# EAGLE board main-board (EAGLE 9.6.2)
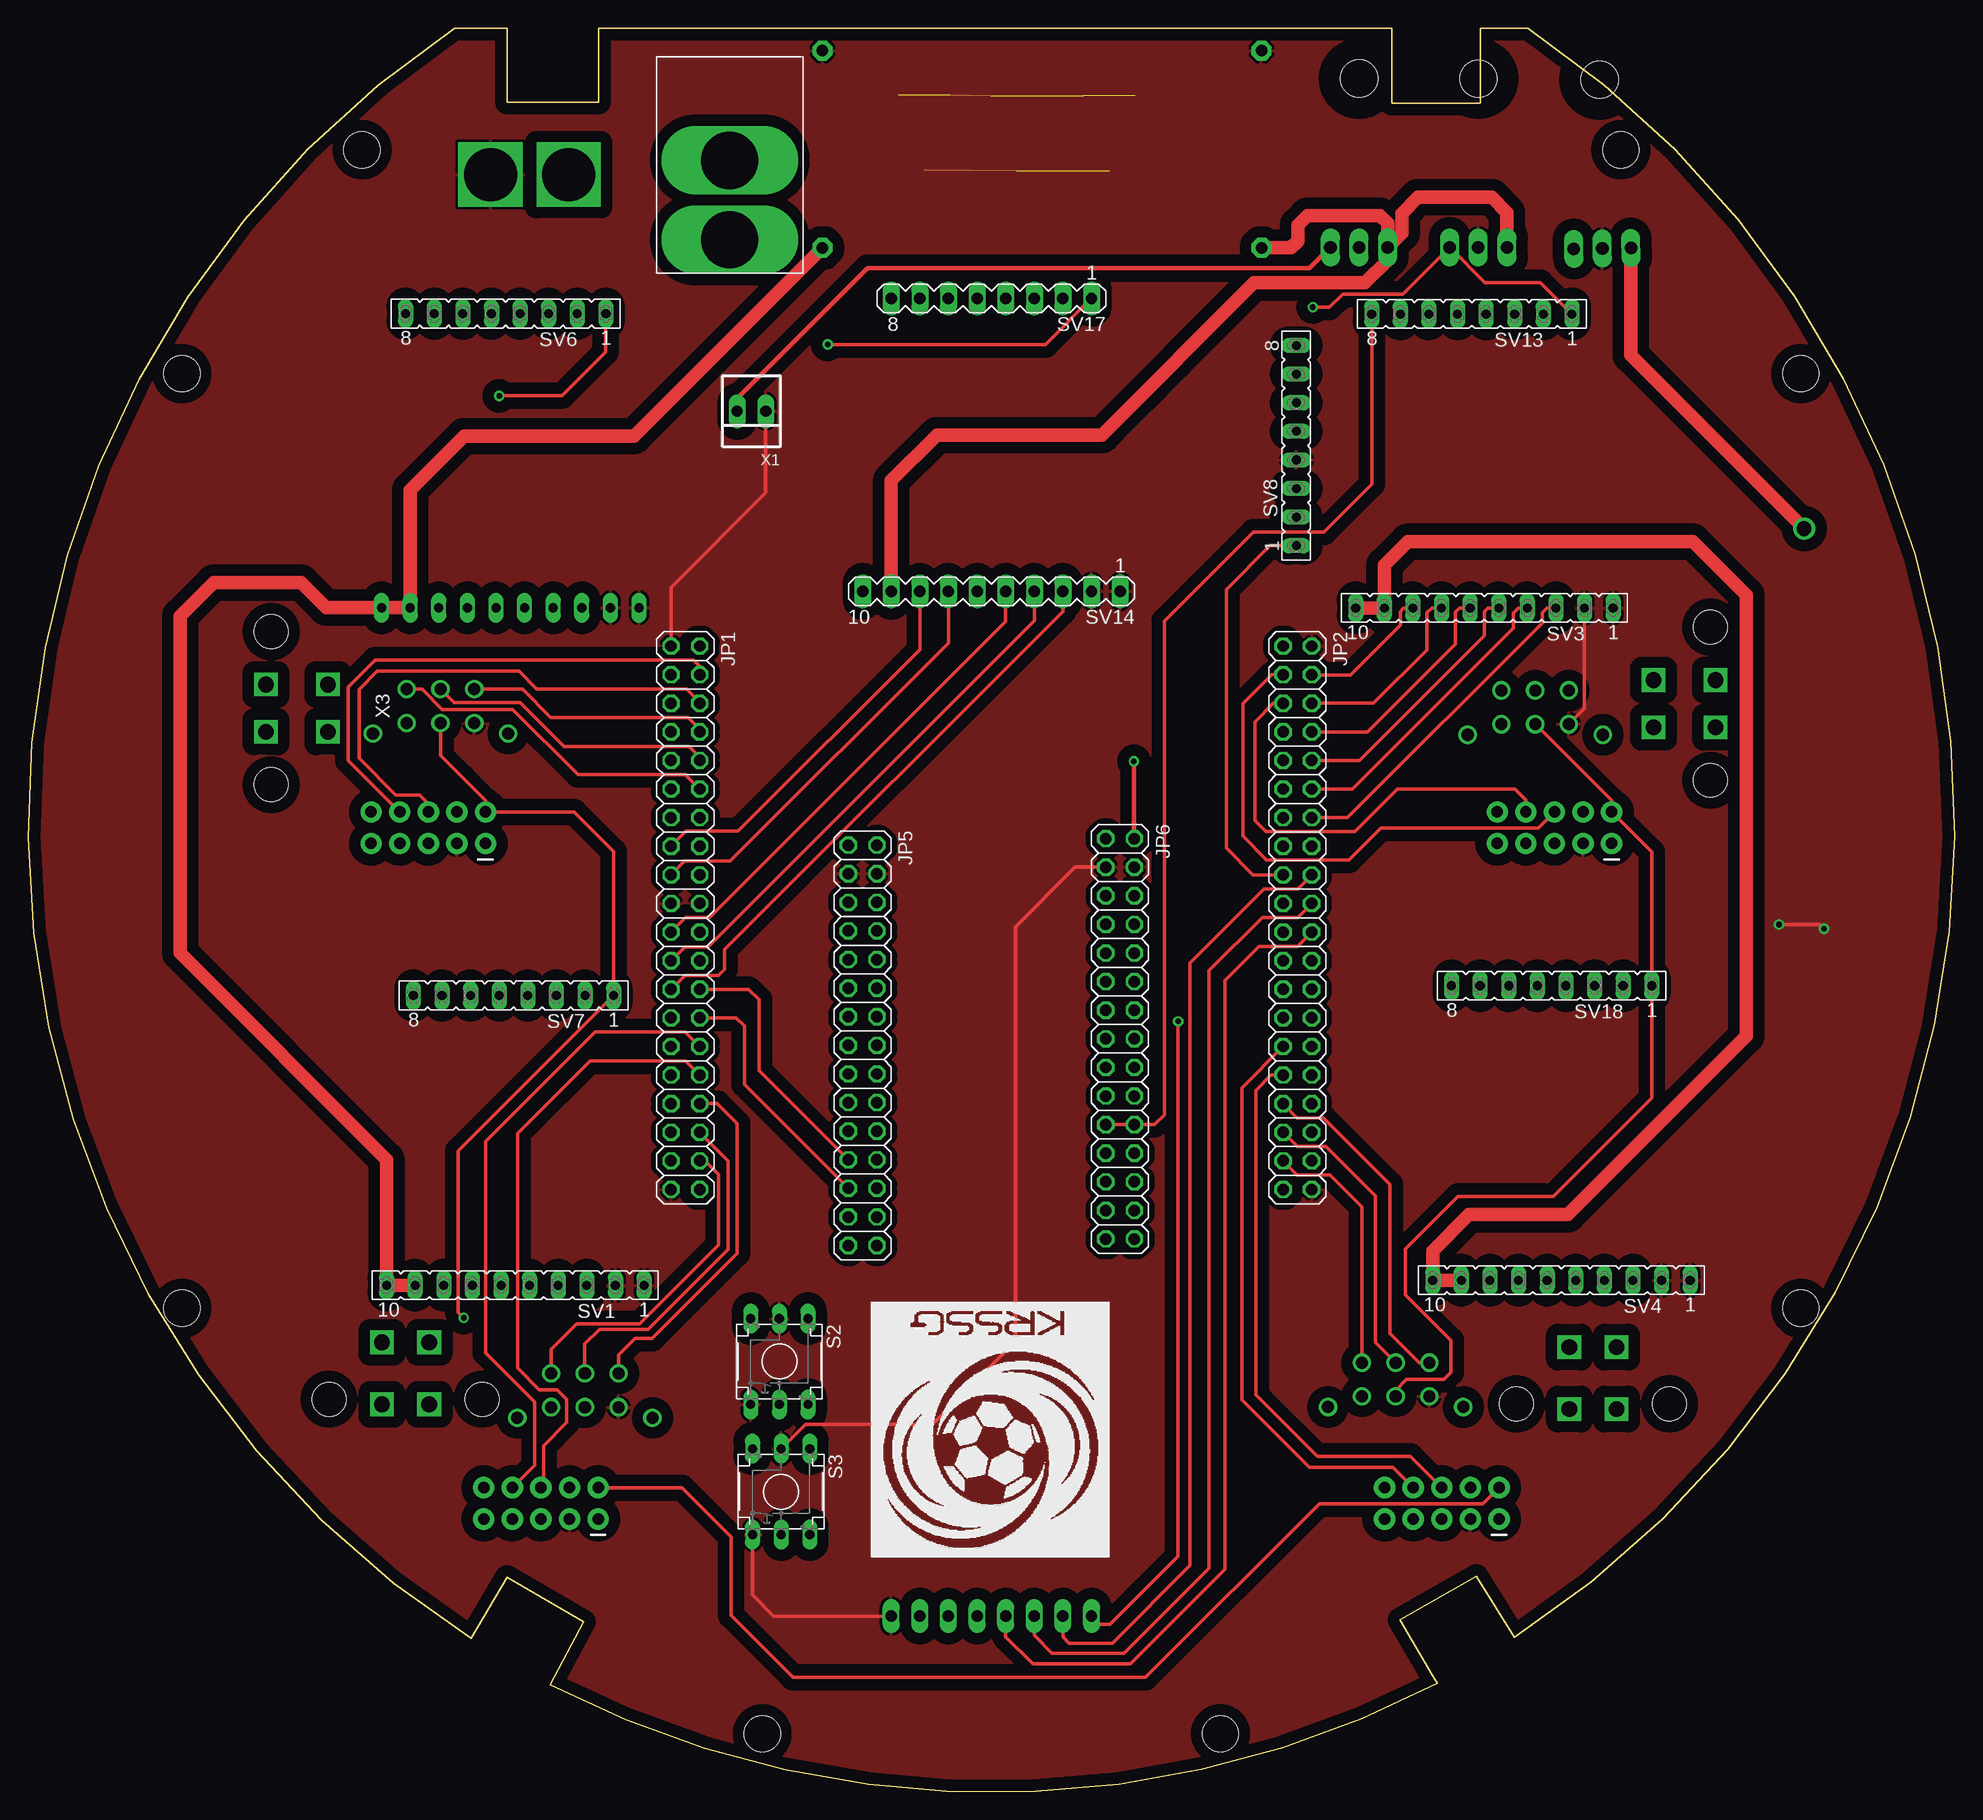
[diagram p0: board, top side]
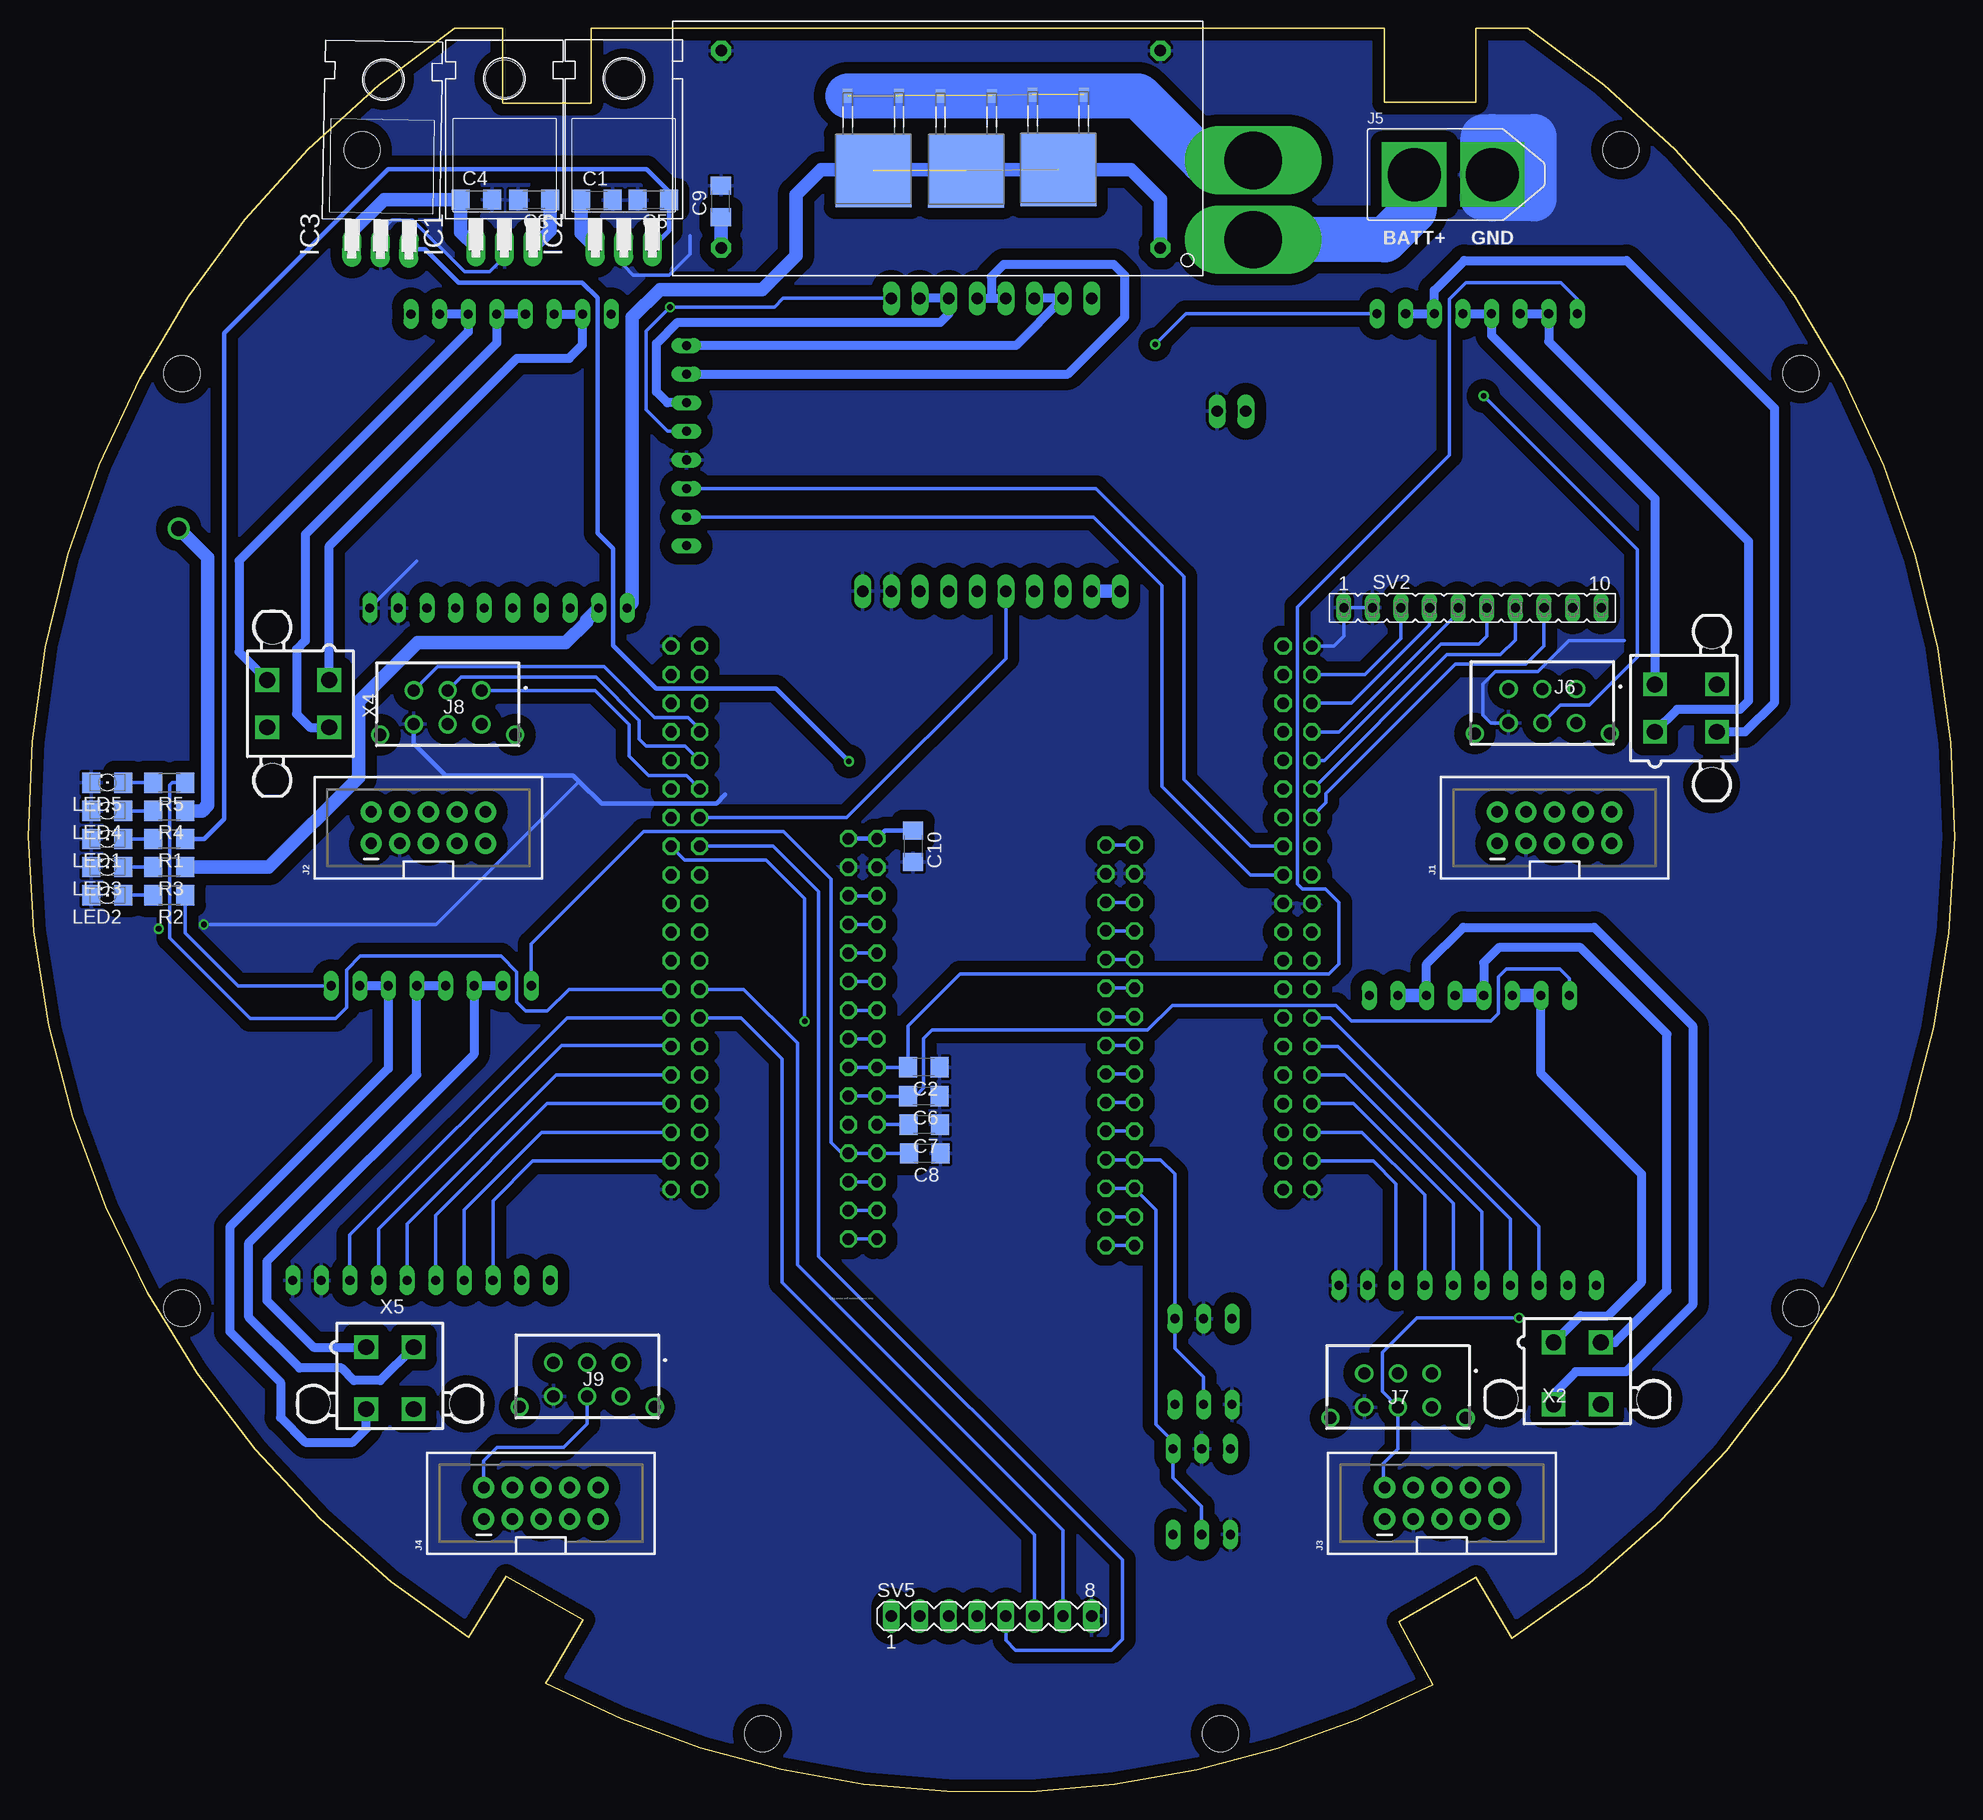
[diagram p1: board, bottom side, seen from below]

Size 171.07 x 156.59 mm. Coordinates in mm from the lower left corner, seen from the top.
Outline: 133.18,156.59 128.95,156.59 128.95,149.93 121.08,149.93 121.08,156.59 50.64,156.59 50.64,150.03 42.52,150.03 42.52,156.59 37.88,156.59 arc113 39.33,13.59 42.51,19.04 49.33,15.07 46.33,9.49 arc55 125.13,9.59 124.69,10.3 121.79,15.26 128.61,19.1 131.95,13.69 arc113 133.18,156.59
Copper layers (1*16): Top 0.035mm / dielectric 0.3mm / Bottom 0.035mm
Design rules "default *": minimum track width 6mil, minimum drill 0.35mm, track to track 6mil, track to pad 6mil, pad to pad 6mil, via to via 6mil, smd to smd 6mil, copper to edge 40mil, drill to drill 6mil, minimum pad ring 10mil, minimum via ring 8mil, stop-mask expansion 4mil, vias tented up to drill 0mil, thermal gap 10mil
Net classes: 0 signal1: width 0.3 mm, drill 0.4 mm, clearance 0.2 mm; 1 5v: width 0.4 mm, drill 0.4 mm, clearance 0.2 mm; 2 18V: width 1.2 mm, drill 1.3 mm, clearance 0.2 mm; 3 signal: width 0.3 mm, drill 0.4 mm, clearance 0.2 mm; 4 gnd: width 0.3 mm, drill 0.4 mm, clearance 0.2 mm; 5 VCKT: width 4 mm, drill 4 mm, clearance 0.2 mm; 6 motor: width 0.8 mm, drill 1 mm, clearance 0.2 mm
Holes 3.2 mm at 13.66,42.92 65.2,5.12 105.87,5.12 157.41,42.92 29.64,145.78 13.66,125.92 141.42,145.78 157.41,125.92

## Footprints (pad centres in the part's own frame; a part is rotated, then mirrored left to right if it is on the bottom)
C1206 = smd 1.6 x 1.8: 1 -1.4,0; 2 1.4,0
TO220H = drill 1.118 long: 1 -2.54,-10.16; 2 0,-10.16; 3 2.54,-10.16 | hole 3.302: 0,4.826
2X5-SHROUDED_LOCK = drill 1.016 pad 1.88: 1 -1.397,5.08; 2 1.397,5.08; 3 -1.397,2.54; 4 1.397,2.54; 5 -1.397,0; 6 1.397,0; 7 -1.397,-2.54; 8 1.397,-2.54; 9 -1.397,-5.08; 10 1.397,-5.08
XT-60 = drill 4.7 square: BATT 0,4.154; GND 0,11.092
43045-0613 = drill 1.07 pad 1.62: 1 3,0; 2 0,0; 3 -3,0; 4 3,3; 5 0,3; 6 -3,3; 7 -6,3.94; 8 6,3.94
2X20 = drill 1.016 octagon: 1 -24.13,-1.27; 2 -24.13,1.27; 3 -21.59,-1.27; 4 -21.59,1.27; 5 -19.05,-1.27; 6 -19.05,1.27; 7 -16.51,-1.27; 8 -16.51,1.27; 9 -13.97,-1.27; 10 -13.97,1.27; 11 -11.43,-1.27; 12 -11.43,1.27; 13 -8.89,-1.27; 14 -8.89,1.27; 15 -6.35,-1.27; 16 -6.35,1.27; 17 -3.81,-1.27; 18 -3.81,1.27; 19 -1.27,-1.27; 20 -1.27,1.27; 21 1.27,-1.27; 22 1.27,1.27; 23 3.81,-1.27; 24 3.81,1.27; 25 6.35,-1.27; 26 6.35,1.27; 27 8.89,-1.27; 28 8.89,1.27; 29 11.43,-1.27; 30 11.43,1.27; 31 13.97,-1.27; 32 13.97,1.27; 33 16.51,-1.27; 34 16.51,1.27; 35 19.05,-1.27; 36 19.05,1.27; 37 21.59,-1.27; 38 21.59,1.27; 39 24.13,-1.27; 40 24.13,1.27
2X15 = drill 1.016 octagon: 1 -17.78,-1.27; 2 -17.78,1.27; 3 -15.24,-1.27; 4 -15.24,1.27; 5 -12.7,-1.27; 6 -12.7,1.27; 7 -10.16,-1.27; 8 -10.16,1.27; 9 -7.62,-1.27; 10 -7.62,1.27; 11 -5.08,-1.27; 12 -5.08,1.27; 13 -2.54,-1.27; 14 -2.54,1.27; 15 0,-1.27; 16 0,1.27; 17 2.54,-1.27; 18 2.54,1.27; 19 5.08,-1.27; 20 5.08,1.27; 21 7.62,-1.27; 22 7.62,1.27; 23 10.16,-1.27; 24 10.16,1.27; 25 12.7,-1.27; 26 12.7,1.27; 27 15.24,-1.27; 28 15.24,1.27; 29 17.78,-1.27; 30 17.78,1.27
1206 = smd 1.6 x 1.803: A -1.422,0; C 1.422,0
R1206 = smd 1.6 x 1.803: 1 -1.422,0; 2 1.422,0
TME1 = drill 0.813 long: 1 -2.54,-3.81; 2 0,-3.81; 3 2.54,-3.81; 4 2.54,3.81; 5 0,3.81; 6 -2.54,3.81
FE10 = drill 0.813 long: 1 -11.43,0; 2 -8.89,0; 3 -6.35,0; 4 -3.81,0; 5 -1.27,0; 6 1.27,0; 7 3.81,0; 8 6.35,0; 9 8.89,0; 10 11.43,0
MA08-1 = drill 1.016 long: 1 -8.89,0; 2 -6.35,0; 3 -3.81,0; 4 -1.27,0; 5 1.27,0; 6 3.81,0; 7 6.35,0; 8 8.89,0
FE08 = drill 0.813 long: 1 -8.89,0; 2 -6.35,0; 3 -3.81,0; 4 -1.27,0; 5 1.27,0; 6 3.81,0; 7 6.35,0; 8 8.89,0
MA10-1 = drill 1.016 long: 1 -11.43,0; 2 -8.89,0; 3 -6.35,0; 4 -3.81,0; 5 -1.27,0; 6 1.27,0; 7 3.81,0; 8 6.35,0; 9 8.89,0; 10 11.43,0
TO228P1042X238-3N = smd 0.889 x 1.219: 1 -2.286,-6.502; 3 2.286,-6.502 | smd 6.731 x 6.502: 2 0,0.152
BUCK = drill 1.016 pad 1.778 octagon: GND 0,0; GNDO 39,0; VIN 0,17.5; VOUT 39,17.5
DA10 = drill 5.08 pad 5.334 long: P$1 0,0; P$2 -7.048,0
22-23-2021 = drill 1 long: 1 -1.27,0; 2 1.27,0
5566-4 = drill 1.4 square: 1 2.1,-2.75; 2 -2.1,-2.75; 3 2.1,2.75; 4 -2.1,2.75 | hole 3: 6.8,2.29; -6.8,2.29

## Placement (x,y rotation side)
C1  47uF  [C1206]  120.58,141.33 0 bottom
C2  47uF  [C1206]  91.53,64.31 180 bottom
C3  47uF  [C1206]  126.14,141.33 180 bottom
C4  47uF  [C1206]  131.26,141.36 0 bottom
C5  47uF  [C1206]  115.56,141.33 180 bottom
C6  47uF  [C1206]  91.53,61.74 180 bottom
C7  47uF  [C1206]  91.51,59.22 180 bottom
C8  47uF  [C1206]  91.45,56.66 180 bottom
C9  47uF  [C1206]  109.55,141.19 90 bottom
C10  47uF  [C1206]  92.49,83.95 270 bottom
IC1  7805T  [TO220H]  128.77,147.28 0 bottom
IC2  7805T  [TO220H]  118.18,147.29 0 bottom
IC3  7805T  [TO220H]  139.61,147.18 359 bottom
J1  [2X5-SHROUDED_LOCK]  35.53,85.59 90 bottom
J2  [2X5-SHROUDED_LOCK]  135.53,85.59 90 bottom
J3  [2X5-SHROUDED_LOCK]  45.53,25.59 90 bottom
J4  [2X5-SHROUDED_LOCK]  125.53,25.59 90 bottom
J5  XT-60BATT_LABEL  [XT-60]  52.14,143.59 270 bottom
J6  43045-0613  [43045-0613]  36.61,97.89 180 bottom
J7  43045-0613  [43045-0613]  49.43,37.13 180 bottom
J8  43045-0613  [43045-0613]  133.82,97.78 180 bottom
J9  43045-0613  [43045-0613]  121.43,38.08 180 bottom
JP1  [2X20]  58.36,77.59 270 top
JP2  [2X20]  112.71,77.59 270 top
JP5  [2X15]  74.1,66.26 270 top
JP6  [2X15]  96.96,66.84 270 top
LED1  [1206]  164.03,84.59 180 bottom
LED2  [1206]  164.03,79.59 180 bottom
LED3  [1206]  164.03,82.09 180 bottom
LED4  [1206]  164.03,87.09 180 bottom
LED5  [1206]  164.03,89.59 180 bottom
R1  [R1206]  158.53,84.59 180 bottom
R2  [R1206]  158.53,79.59 180 bottom
R3  [R1206]  158.53,82.09 180 bottom
R4  [R1206]  158.53,87.09 180 bottom
R5  [R1206]  158.53,89.59 180 bottom
S2  TME1  [TME1]  66.7,38.18 180 top
S3  TME1  [TME1]  66.86,26.63 180 top
SV1  [FE10]  43.25,44.95 180 top
SV2  [FE10]  42.81,105.12 0 bottom
SV3  [FE10]  129.31,105.1 180 top
SV4  [FE10]  136.15,45.4 180 top
SV5  [MA08-1]  85.53,15.59 0 bottom
SV6  [FE08]  42.4,131.24 180 top
SV7  [FE08]  43.09,70.69 180 top
SV8  [FE08]  112.61,119.52 90 top
SV13  [FE08]  128.19,131.2 180 top
SV14  [MA10-1]  85.53,106.59 180 top
SV17  [MA08-1]  85.53,132.59 180 top
SV18  [FE08]  135.28,71.55 180 top
U1  [TO228P1042X238-3N]  96.01,144.08 180 bottom
U2  [TO228P1042X238-3N]  87.78,144.07 180 bottom
U3  [TO228P1042X238-3N]  79.59,144.18 180 bottom
U$1  [LOGO3]  96,43.46 180 top
U$4  BUCK  [BUCK]  70.53,154.59 180 bottom
U$5  [DA10]  62.29,144.85 90 top
X1  22-23-2021  [22-23-2021]  64.22,122.57 180 top
X2  5566-4  [5566-4]  33.51,37.13 180 bottom
X3  5566-4  [5566-4]  23.86,96.21 270 bottom
X4  5566-4  [5566-4]  147.09,96.6 90 bottom
X5  5566-4  [5566-4]  138.95,36.71 180 bottom

## Library data of the parts
C1-C10 = rcl
IC1-IC3 = linear
J1-J4 = SparkFun-Connectors; PROD_ID: CONN-08671; SF_ID: PRT-08506
J5 = RoboJackets-Connectors
J6-J9 = 43045-0613; ALLIED_NUMBER: 70090681; ALLIED_PRICE-STOCK: http://www.alliedelec.com/molex-incorporated-43045-0613/70090681/; DESCRIPTION: Header 3.00mm, WTB, dual row, vert,6w Molex MICRO-FIT 3.0 Series, Series Number 43045, 3mm Pitch 6 Way 2 Row Straight PCB Header, Solder Termination, 5A; HEIGHT: mm; MANUFACTURER_NAME: Molex; MANUFACTURER_PART_NUMBER: 43045-0613; MOUSER_PART_NUMBER: 538-43045-0613; MOUSER_PRICE-STOCK: https://www.mouser.com/Search/Refine.aspx?Keyword=538-43045-0613; RS_PART_NUMBER: 6700377P; RS_PRICE-STOCK: http://uk.rs-online.com/web/p/products/6700377P
JP1 JP2 JP5 JP6 = pinhead
LED1-LED5 = led
R1-R5 = resistor
S2 S3 = switch-misc
SV1-SV4 SV6-SV8 SV13 SV18 = con-lsta; OC_FARNELL: unknown; OC_NEWARK: unknown
SV5 SV14 SV17 = con-lstb; OC_FARNELL: unknown; OC_NEWARK: unknown
U1-U3 = LP38690DT-3.3; MPN: LP38690DT-3.3; OC_FARNELL: 1008048; OC_NEWARK: 41K7439; PACKAGE: TO-252; SUPPLIER: National Semiconductor
U$1 = krssg_logo
U$4 = BUCK
U$5 = switch_DA10
X1 = con-molex; MF: MOLEX; MPN: 22-23-2021; OC_FARNELL: 1462926; OC_NEWARK: 25C3832
X2-X5 = con-molex; MF: MOLEX; OC_FARNELL: unknown; OC_NEWARK: unknown

## Nets
5V1 [5v]: C5.1 IC2.3 R1.1 X1.2
5V_ESP [5v]: C10.1 IC3.3 JP6.1 JP6.2
12V [18V]: C1.1 C4.1 C9.1 IC1.1 IC2.1 IC3.1 R4.1 SV14.9 SV14.10 U$4.VOUT
18V [18V]: R3.1 SV1.9 SV1.10 SV2.9 SV2.10 SV3.9 SV3.10 SV4.9 SV4.10 U1.2 U2.2 U3.2 U$4.VIN
CHARGE [signal]: JP2.16 SV5.1
DONE [signal]: JP2.18 SV5.2
ESP_EN [signal]: JP2.24
ESP_REC [signal]: JP6.15 JP6.16
ESP_RX [signal]: JP1.26 JP5.23 JP5.24 S2.1 S2.5
ESP_TRANS [signal]: JP6.13 JP6.14
ESP_TX [signal]: JP1.28 JP5.25 JP5.26 S3.1 S3.5
FPGA_REC [signal]: JP2.26 R5.1
GND [gnd]: C1.2 C2.1 C3.2 C4.2 C5.2 C6.1 C7.1 C8.1 C9.2 C10.2 IC1.2 IC2.2 IC3.2 J1.3 J2.3 J3.3 J4.3 J5.GND J6.4 J7.4 J8.4 J9.4 JP1.1 JP1.19 JP1.20 JP1.39 JP2.2 JP2.40 JP5.3 JP5.4 JP6.3 JP6.4 LED1.C LED2.C LED3.C LED4.C LED5.C S2.2 S2.4 S3.2 S3.4 SV1.1 SV1.2 SV2.1 SV2.2 SV3.1 SV3.2 SV4.1 SV4.2 SV5.8 SV8.4 SV14.1 SV14.2 U$4.GND U$4.GNDO X1.1
INPUT [VCKT]: U1.1 U1.3 U2.1 U2.3 U3.1 U3.3 U$5.P$1
IR1 [signal]: JP2.25 SV5.7
IR2 [signal]: JP2.27 SV5.6
IR3 [signal]: JP2.15 SV5.5
KICK [signal]: JP2.22 SV5.4
KICK_CHIP [signal]: JP2.20 SV5.3
M1ACS_OUT [signal]: C2.2 JP6.17 JP6.18 SV6.8
M1EA [signal]: J1.6 JP1.6
M1EB [signal]: J1.8 JP1.4
M1H1 [signal]: J6.1 JP1.8
M1H2 [signal]: J6.2 JP1.10
M1H3 [signal]: J6.3 JP1.12
M2ACS_OUT [signal]: C6.2 JP6.19 JP6.20 SV7.8
M2EA [signal]: J3.6 JP1.32
M2EB [signal]: J3.8 JP1.30
M2H1 [signal]: J7.1 JP1.34
M2H2 [signal]: J7.2 JP1.36
M2H3 [signal]: J7.3 JP1.38
M3ACS_OUT [signal]: C7.2 JP6.21 JP6.22 SV13.8
M3EA [signal]: J2.6 JP2.3
M3EB [signal]: J2.8 JP2.5
M3H1 [signal]: J8.1 JP2.7
M3H2 [signal]: J8.2 JP2.9
M3H3 [signal]: J8.3 JP2.11
M4ACS_OUT [signal]: C8.2 JP6.23 JP6.24 SV18.8
M4EA [signal]: J4.6 JP2.31
M4EB [signal]: J4.8 JP2.29
M4H1 [signal]: J9.1 JP2.33
M4H2 [signal]: J9.2 JP2.35
M4H3 [signal]: J9.3 JP2.37
M11 [motor]: SV6.6 SV6.7 X3.1
M11A [signal]: JP1.13 SV2.8
M11B [signal]: JP1.11 SV2.7
M12 [motor]: SV6.4 SV6.5 X3.2
M12A [signal]: JP1.9 SV2.6
M12B [signal]: JP1.7 SV2.5
M13 [motor]: SV6.2 SV6.3 X3.3
M13A [signal]: JP1.5 SV2.4
M13B [signal]: JP1.3 SV2.3
M21 [motor]: SV7.6 SV7.7 X2.1
M21A [signal]: JP1.27 SV1.8
M21B [signal]: JP1.29 SV1.7
M22 [motor]: SV7.4 SV7.5 X2.2
M22A [signal]: JP1.31 SV1.6
M22B [signal]: JP1.33 SV1.5
M23 [motor]: SV7.2 SV7.3 X2.3
M23A [signal]: JP1.35 SV1.4
M23B [signal]: JP1.37 SV1.3
M31 [motor]: SV13.6 SV13.7 X4.1
M31A [signal]: JP2.4 SV3.8
M31B [signal]: JP2.6 SV3.7
M32 [motor]: SV13.4 SV13.5 X4.2
M32A [signal]: JP2.8 SV3.6
M32B [signal]: JP2.10 SV3.5
M33 [motor]: SV13.2 SV13.3 X4.3
M33A [signal]: JP2.12 SV3.4
M33B [signal]: JP2.14 SV3.3
M41 [motor]: SV18.6 SV18.7 X5.1
M41A [signal]: JP2.38 SV4.8
M41B [signal]: JP2.36 SV4.7
M42 [motor]: SV18.4 SV18.5 X5.2
M42A [signal]: JP2.34 SV4.6
M42B [signal]: JP2.32 SV4.5
M43 [motor]: SV18.2 SV18.3 X5.3
M43A [signal]: JP2.30 SV4.4
M43B [signal]: JP2.28 SV4.3
MD1 [motor]: SV8.8 SV17.6 SV17.7
MD1A [signal]: JP1.15 SV14.8
MD1B [signal]: JP1.17 SV14.7
MD2 [motor]: SV8.7 SV17.4 SV17.5
MD2A [signal]: JP2.13 SV14.6
MD2B [signal]: JP1.21 SV14.5
MD3 [motor]: SV8.6 SV17.2 SV17.3
MD3A [signal]: JP1.23 SV14.4
MD3B [signal]: JP1.25 SV14.3
MDACS_OUT: SV17.8
MDH1 [signal]: JP1.16 SV8.3
MDH2 [signal]: JP1.18 SV8.2
MDH3 [signal]: JP2.17 SV8.1
N$1: JP5.1 JP5.2
N$4: LED1.A R1.2
N$6: JP5.5 JP5.6
N$7: LED2.A R2.2
N$8: JP5.7 JP5.8
N$9: JP5.9 JP5.10
N$10: LED3.A R3.2
N$11: JP5.11 JP5.12
N$12: JP5.13 JP5.14
N$13: LED4.A R4.2
N$14: JP5.15 JP5.16
N$15: JP5.17 JP5.18
N$16: LED5.A R5.2
N$17: JP5.19 JP5.20
N$18: JP5.21 JP5.22
N$23: JP5.27 JP5.28
N$24: JP5.29 JP5.30
N$27: JP6.5 JP6.6
N$28: JP6.7 JP6.8
N$29: JP6.9 JP6.10
N$30: JP6.11 JP6.12
N$38: JP6.27 JP6.28
N$39: JP6.29 JP6.30
N$41: JP6.25 JP6.26
SUPP [VCKT]: J5.BATT U$5.P$2
VCC: C3.1 IC1.3 J1.2 J2.2 J3.2 J4.2 J6.5 J7.5 J8.5 J9.5 R2.1 SV6.1 SV7.1 SV8.5 SV13.1 SV17.1 SV18.1

## Tracks (layer width: path | path; a pad name or v marks a point on that pad's centre or on a via)
5V1
  Top 0.4: IC2.3 113.77,135.26 74.53,135.26 62.95,123.68 X1.2
  Bottom 0.4: IC2.3 114.16,138.61 C5.1 114.16,142.06 116.16,144.05 139.12,144.05 153.66,129.52 153.66,86.38 155.45,84.59 R1.1
5V_ESP  (via drill 0.5)
  Top 0.4: v98.19,91.48 98.19,84.67 JP6.2
  Bottom 0.4: C10.1 94.97,85.35 JP6.1 JP6.2 | IC3.3 135.83,136.98 132.86,134.01 121.86,134.01 120.49,132.64 120.49,111.74 119.15,110.39 119.15,101.76 115.33,97.94 110.09,97.94 109.36,97.94 104.65,97.94 v98.19,91.48
12V  (via drill 1.3)
  Top 1.2: v157.71,112.15 142.33,127.53 IC3.1 | IC1.1 131.31,140.22 129.98,141.56 123.42,141.56 121.99,140.13 121.99,138.39 IC2.1 | IC2.1 120.72,139.28 120.05,139.95 113.61,139.95 112.75,139.08 112.75,137.69 112.14,137.09 U$4.VOUT | IC2.1 120.72,135.99 118.71,133.98 108.86,133.98 95.34,120.46 80.7,120.46 76.64,116.41 SV14.9
  Bottom 1.2: R4.1 155.63,87.09 155.13,87.59 155.13,94.05 155.13,109.58 v157.71,112.15 | IC1.1 132.66,138.47 C4.1 139.48,141.36 142.33,138.51 IC3.1 | C1.1 121.98,138.39 IC2.1 | C9.1 109.53,139.77 U$4.VOUT | SV14.10 SV14.9
18V  (2 unrouted)
  Top 1.2: SV4.9 SV4.10 124.72,48.03 127.95,51.26 136.74,51.26 152.58,67.1 152.58,106.24 147.82,111.01 122.54,111.01 120.42,108.89 SV3.9 SV3.10 | SV1.9 SV1.10 31.82,56.11 13.49,74.44 13.49,104.36 16.46,107.33 24.23,107.33 26.45,105.12 SV2.10 SV2.9 33.92,115.57 38.71,120.36 53.81,120.36 U$4.VIN
  Bottom 1.2: U$4.VIN 70.53,141.42 73.15,144.03 U3.2 100.68,144.03 102.89,141.82 102.89,136.39 105.9,133.38 114.96,133.38 117.42,130.91 117.42,105.56 SV3.10 | SV3.9 121.5,104.02 121.5,103.84 123.33,102.01 136.49,102.01 141.73,96.77 141.73,90.06 149.7,82.09 R3.1
CHARGE  (via drill 0.5)
  Top 0.3: v102.12,68.39 102.11,68.39 102.11,20.89 96.06,14.84 95.17,14.84 SV5.1
  Bottom 0.3: JP2.16 112.78,82.74 105.55,82.74 102.12,79.32 v102.12,68.39
DONE
  Top 0.3: JP2.18 112.75,80.16 109.75,80.16 103.18,73.59 103.18,20.07 96.28,13.17 92.45,13.17 91.88,13.74 SV5.2
ESP_REC
  Bottom 0.3: JP6.16 JP6.15
ESP_RX
  Top 0.3: JP5.23 64.9,64.03 64.9,70.33 63.99,71.24 JP1.26
  Bottom 0.3: S2.5 66.7,36.82 69.24,39.36 S2.1 69.24,54.83 70.52,56.1 JP5.23 JP5.24
ESP_TRANS
  Bottom 0.3: JP6.13 JP6.14
ESP_TX
  Top 0.3: JP1.28 62.88,68.7 63.61,67.97 63.61,62.78 JP5.25
  Bottom 0.3: JP5.26 JP5.25 70.91,51.63 70.91,32.59 69.4,31.09 S3.1 69.4,27.87 66.86,25.33 S3.5
FPGA_REC
  Bottom 0.3: JP2.26 123.04,71.24 124.99,69.29 126.9,69.29 127.7,70.1 127.7,72.79 129.09,74.18 141.59,74.18 142.81,72.97 142.81,69.63 143.78,68.65 151.36,68.65 158.5,75.8 158.5,89.37 158.29,89.59 R5.1
GND  (via drill 0.5)
  Top 0.3: X1.1 65.49,115.32 57.09,106.92 JP1.1 | S3.2 69.03,32.61 80.32,32.61 87.67,39.96 87.67,76.79 92.96,82.08 JP6.3 | S3.4 64.32,17.47 66.21,15.58 SV5.8 | SV3.2 138.2,96.16 J8.4 | v155.48,76.99 159.11,76.99 v159.48,76.62
  Bottom 0.3: SV2.2 SV2.1 54.24,102.6 55.13,101.72 JP1.1 | J6.4 41.18,94.89 41.9,95.61 41.9,98.35 40.78,99.47 36.99,99.47 34.24,102.22 29.35,102.22 | 112.29,138.16 112.29,136.53 114.16,134.66 117.34,134.66 118.2,135.52 118.2,137.11 IC2.2 | SV3.1 136.6,109.25 | 122.15,89.7 134.86,76.99 v155.48,76.99 | IC3.2 139.79,138.54 138.78,139.55 136.93,139.55 132.34,134.95 130.11,134.95 128.77,136.28 IC1.2
  Bottom 0.4: J8.4 136.82,93.06 134.01,90.24 122.69,90.24 122.15,89.7 120.17,87.72 109.97,87.72 109.17,88.52
  Bottom 4: J5.GND 41.05,146.96 37.35,146.96 37.35,141.44 41.05,141.44 J5.GND | J5.GND 41.92,143.59 | J5.GND 41.94,143.59 41.94,141.56 | J5.GND 41.89,143.59 41.89,146.92
  pour Bottom (isolate 1.016): 22.03,166.87 141.41,166.87 180.78,127.5 180.78,43.68 128.71,-8.39 37.27,-8.39 -11.33,40.21 -11.33,133.51
  pour Top (isolate 1.016): 22.03,166.87 141.41,166.87 180.78,127.5 180.78,43.68 128.71,-8.39 37.27,-8.39 -10.99,39.87 -10.99,133.85
INPUT  (5 unrouted)
  Bottom 4: U$5.P$1 66.76,144.85 72.49,150.58 U1.3
IR1
  Bottom 0.3: SV5.7 79.18,23.19 102.77,46.77 102.77,66.48 107.53,71.24 JP2.25
IR2
  Bottom 0.3: JP2.27 107.75,68.7 104.11,65.06 104.11,45.2 81.72,22.81 SV5.6
IR3
  Bottom 0.3: JP2.15 104.91,83.94 100.88,79.9 100.88,47.54 73.89,20.55 73.89,13.54 74.87,12.56 83.38,12.56 84.26,13.45 SV5.5
KICK
  Top 0.3: SV5.4 86.8,13.75 89.22,11.33 97.88,11.33 106.27,19.72 106.27,72 109.31,75.04 112.7,75.04 JP2.22
KICK_CHIP
  Top 0.3: JP2.20 112.74,77.62 109.59,77.62 104.86,72.89 104.86,19.81 97.31,12.27 90.94,12.27 89.34,13.86 SV5.3
M1ACS_OUT
  Bottom 0.3: SV6.8 33.51,132.53 34.97,133.99 43.41,133.99 44.88,132.51 44.88,118.66 58.36,105.19 58.36,101.94 58.36,80.6 57.91,80.14 55.89,80.14 54.67,78.93 54.67,73.49 55.57,72.6 88.31,72.6 92.93,67.98 C2.2 JP6.17 JP6.18
M1EA
  Top 0.3: JP1.6 59.63,96.74 58.45,97.91 45.15,97.91 43.58,99.48 30.98,99.48 29.37,97.87 29.37,91.77 32.64,88.5 34.76,88.5 35.53,87.72 J1.6
M1EB
  Top 0.3: J1.8 28.43,91.55 28.43,98.08 30.81,100.47 59.11,100.47 59.63,99.95 JP1.4
M1H1
  Top 0.3: J6.1 43.9,97.89 46.41,95.37 58.62,95.37 59.63,94.36 JP1.8
M1H2
  Top 0.3: JP1.10 59.63,91.86 58.7,92.79 47.57,92.79 43.67,96.7 37.81,96.7 J6.2
M1H3
  Top 0.3: JP1.12 58.35,90.3 48.82,90.3 43.02,96.09 36.77,96.09 34.97,97.89 J6.3
M2ACS_OUT
  Bottom 0.3: JP6.20 JP6.19 95.67,61.74 C6.2 92.27,61.74 91.55,62.46 91.55,66.88 90.82,67.61 71.66,67.61 69.46,69.81 54.96,69.81 53.56,68.41 41.18,68.41 40.51,69.09 40.51,72.35 39.81,73.05 35.06,73.05 34.2,72.19 SV7.8
M2EA
  Top 0.3: JP1.32 58.37,64.88 49.91,64.88 43.45,58.42 43.45,37.6 45.38,35.67 46.99,35.67 47.83,34.83 47.83,32.79 45.76,30.72 45.76,27.21 J3.6
M2EB
  Top 0.3: JP1.30 58.33,67.46 50.36,67.46 40.64,57.74 40.64,38.94 44.98,34.61 44.98,28.97 J3.8
M2H1
  Top 0.3: J7.1 52.43,38.77 53.91,40.25 55.41,40.25 62.95,47.79 62.95,59.32 61.17,61.1 59.65,61.1 JP1.34
M2H2
  Top 0.3: J7.2 49.43,39.74 50.73,41.04 55.03,41.04 62.16,48.16 62.16,56.01 JP1.36
M2H3
  Top 0.3: J7.3 46.43,39.27 48.71,41.55 54.3,41.55 61.31,48.56 61.31,54.82 60.13,56 JP1.38
M3ACS_OUT
  Top 0.3: SV13.8 119.3,116.08 115.05,111.83 108.79,111.83 100.89,103.92 100.89,60.09 100.01,59.22 JP6.22 JP6.21
  Bottom 0.3: C7.2 JP6.21
M3EA
  Top 0.3: J2.6 134.1,85.56 120.12,85.56 117.3,82.74 109.97,82.74 107.87,84.84 107.87,96.62 110.43,99.18 JP2.3
M3EB
  Top 0.3: JP2.5 110.6,96.64 108.94,94.99 108.94,86.22 109.92,85.24 117.81,85.24 121.58,89.01 132.04,89.01 132.99,88.05 J2.8
M3H1
  Bottom 0.3: J8.1 134.72,99.89 119.94,99.89 115.44,95.38 112.47,95.38 111.44,94.35 JP2.7
M3H2
  Bottom 0.3: J8.2 132.64,98.97 120.65,98.97 116.81,95.12 116.81,93.45 116.21,92.84 112.73,92.84 JP2.9
M3H3
  Bottom 0.3: J8.3 120.73,97.78 117.71,94.76 117.71,91.93 115.98,90.21 112.63,90.21 JP2.11
M4ACS_OUT
  Bottom 0.3: C8.2 95.67,56.66 | 95.67,56.66 JP6.23 | JP6.24 98.21,56.66 | 98.21,56.66 95.67,56.66 | SV18.8 126.39,75.27 116.41,85.26 103.99,85.26 99.79,81.05 99.79,57.64 98.8,56.66 98.21,56.66
M4EA
  Top 0.3: JP2.31 110.37,63.62 109.02,62.27 109.02,35.23 114.49,29.76 122.76,29.76 J4.6
M4EB
  Top 0.3: JP2.29 107.77,62.49 107.77,34.78 113.76,28.78 121.2,28.78 J4.8
M4H1
  Top 0.3: JP2.33 112.69,59.83 115.02,59.83 120.93,53.92 120.93,40.7 123.55,38.08 J9.1
M4H2
  Top 0.3: J9.2 119.64,39.88 119.64,52.89 115.25,57.28 112.7,57.28 JP2.35
M4H3
  Top 0.3: J9.3 118.43,51.91 115.58,54.77 112.68,54.77 JP2.37
M11
  Bottom 0.8: SV6.6 SV6.7 36.05,128.77 18.32,111.04 18.32,96.84 19.07,96.09 24.63,96.09 X3.1
M11A
  Bottom 0.3: SV2.8 36.46,101.72 38.08,100.1 44.33,100.1 55.82,88.62 55.82,87.81 57.09,86.54 JP1.13
M11B
  Bottom 0.3: SV2.7 39.01,102.27 40.33,100.95 45.07,100.95 57,89.02 JP1.11
M12
  Bottom 0.8: SV6.4 SV6.5 41.13,129.33 26.61,114.81 X3.2
M12A
  Bottom 0.3: JP1.9 55.97,91.56 45.65,101.88 42.25,101.88 41.54,102.59 SV2.6
M12B
  Bottom 0.3: SV2.5 44.08,104.71 54.69,94.1 JP1.7
M13
  Bottom 0.8: X3.3 18.6,94.11 15.99,96.72 15.99,122.81 29.13,135.95 43.55,135.95 46.21,133.29 SV6.3 SV6.2
M13A
  Bottom 0.3: JP1.5 53.56,96.64 46.62,103.58 SV2.4
M13B
  Bottom 0.3: SV2.3 49.16,102.37 52.35,99.18 JP1.3
M21
  Bottom 0.8: X2.1 33.24,42.26 30.8,42.26 27.8,45.26 27.8,54.81 36.74,63.75 SV7.7
  Bottom 1.2: SV7.7 SV7.6
M21A
  Bottom 0.3: SV1.8 36.9,50.16 55.44,68.7 JP1.27
M21B
  Bottom 0.3: SV1.7 39.44,50.85 54.75,66.16 JP1.29
M22
  Bottom 0.8: X2.2 30.16,39.88 25.54,44.49 25.54,67.26 33.22,74.94 40.48,74.94 41.82,73.6 SV7.5
  Bottom 1.2: SV7.5 SV7.4
M22A
  Bottom 0.3: SV1.6 41.98,51.46 54.15,63.62 JP1.31
M22B
  Bottom 0.3: SV1.5 44.52,52.21 53.39,61.08 JP1.33
M23
  Bottom 0.8: SV7.3 46.9,73.47 43.64,76.74 32.01,76.74 23.27,68 23.27,43.2 29.2,37.27 33.65,37.27 35.61,35.31 X2.3
  Bottom 1.2: SV7.3 SV7.2
M23A
  Bottom 0.3: SV1.4 47.06,52.99 52.62,58.54 JP1.35
M23B
  Bottom 0.3: SV1.3 49.6,53.97 51.64,56 JP1.37
M31
  Bottom 0.8: X4.1 144.34,110.61 127.67,127.28 123.04,127.28 121.84,128.48 SV13.7 SV13.6
M31A
  Top 0.3: SV3.8 122.14,105.1 121.84,104.8 121.84,103.58 117.42,99.16 114.01,99.16 JP2.4
M31B
  Top 0.3: SV3.7 124.63,105.1 124.22,104.69 124.22,101.38 119.48,96.64 JP2.6
M32
  Bottom 0.8: SV13.5 SV13.4 129.46,128.63 146.47,111.62 146.47,102.19 147.24,101.42 147.24,95.69 146.05,94.5 X4.2
M32A
  Top 0.3: SV3.6 127.09,105.1 126.73,104.74 126.73,101.9 118.92,94.1 JP2.8
M32B
  Top 0.3: SV3.5 129.64,105.1 129.3,104.76 129.3,102.66 118.2,91.56 JP2.10
M33
  Bottom 0.8: X4.3 152.34,101.19 152.34,109.29 132,129.62 SV13.3 SV13.2
M33A
  Top 0.3: SV3.4 132.34,105.1 131.88,104.64 131.88,103.3 117.61,89.02 JP2.12
M33B
  Top 0.3: JP2.14 117.15,86.48 134.45,103.77 134.45,104.69 134.85,105.1 SV3.3
M41
  Bottom 0.8: SV18.7 SV18.6 131.47,65.46 149.88,47.05 149.88,43.6 145.74,39.46 X5.1
M41A
  Bottom 0.3: JP2.38 126.26,56 129.8,52.46 SV4.8
M41B
  Top 0.3: 132.43,45.49 SV4.7
  Bottom 0.3: SV4.7 132.34,51.66 125.46,58.54 JP2.36
M42
  Bottom 0.8: SV18.5 SV18.4 136.55,63.64 151.47,48.72 151.47,42.1 146.98,37.61 143.25,37.61 142.15,36.51 139.81,36.51 X5.2
M42A
  Bottom 0.3: JP2.34 124.97,61.08 134.88,51.17 SV4.6
M42B
  Bottom 0.3: JP2.32 124.2,63.62 137.42,50.39 SV4.5
M43
  Bottom 0.8: SV18.2 SV18.3 139.09,64.2 153.16,50.13 153.16,40.84 148.67,36.35 148.67,33.21 146.47,31.02 142.25,31.02 141.05,32.21 X5.3
M43A
  Bottom 0.3: SV4.4 139.96,49.96 123.68,66.24 114.06,66.24 JP2.30
M43B
  Bottom 0.3: JP2.28 123.23,68.7 142.5,49.43 SV4.3
MD1
  Bottom 0.8: SV17.6 SV17.7 83.36,128.41 SV8.8
MD1A
  Top 0.3: JP1.15 58.43,85.28 63.04,85.28 79.18,101.42 SV14.8
MD1B
  Top 0.3: JP1.17 58.3,82.61 62.35,82.61 81.72,101.99 SV14.7
MD2
  Bottom 0.8: SV17.4 85.53,132.59 | 85.53,132.59 SV17.5 | SV8.7 78.74,125.87 73.69,130.93 73.69,134.62 74.65,135.59 84.45,135.59 85.53,134.51 85.53,132.59
MD2A
  Bottom 0.3: SV14.6 84.26,100.62 98.4,86.48 JP2.13
MD2B
  Top 0.3: JP1.21 58.38,77.62 60.53,77.62 86.8,103.89 SV14.5
MD3
  Bottom 0.8: SV17.2 SV17.3 89.34,131.2 90.08,130.47 93.86,130.47 | SV8.6 114.31,123.33 115.28,124.29 115.28,128.58 113.39,130.47 93.86,130.47 | 93.85,130.47 93.86,130.47
MD3A
  Top 0.3: JP1.23 58.31,75.01 60.39,75.01 89.34,103.96 SV14.4
MD3B
  Top 0.3: SV14.3 91.88,104.8 61.84,74.75 61.84,73.02 61.31,72.48 58.33,72.48 JP1.25
MDH1
  Bottom 0.3: JP1.16 62.52,83.94 68.43,89.86 68.43,107.89 76.25,115.71 SV8.3
MDH2
  Bottom 0.3: SV8.2 76.48,113.17 70.41,107.1 70.41,89.25 62.56,81.4 JP1.18
MDH3
  Top 0.3: JP2.17 108.78,81.4 106.39,83.78 106.39,106.73 110.29,110.63 SV8.1
N$1
  Bottom 0.3: JP5.1 JP5.2
N$4
  Bottom 0.3: R1.2 LED1.A
N$6
  Bottom 0.3: JP5.5 JP5.6
N$7
  Bottom 0.3: LED2.A R2.2
N$8
  Bottom 0.3: JP5.7 JP5.8
N$9
  Bottom 0.3: JP5.9 JP5.10
N$10
  Bottom 0.3: LED3.A R3.2
N$11
  Bottom 0.3: JP5.11 JP5.12
N$12
  Bottom 0.3: JP5.14 JP5.13
N$13
  Bottom 0.3: LED4.A R4.2
N$14
  Bottom 0.3: JP5.15 JP5.16
N$15
  Bottom 0.3: JP5.18 JP5.17
N$16
  Bottom 0.3: LED5.A R5.2
N$17
  Bottom 0.3: JP5.19 JP5.20
N$18
  Bottom 0.3: JP5.21 JP5.22
N$23
  Bottom 0.3: JP5.27 JP5.28
N$24
  Bottom 0.3: JP5.30 JP5.29
N$27
  Bottom 0.3: JP6.5 JP6.6
N$28
  Bottom 0.3: JP6.8 JP6.7
N$29
  Bottom 0.3: JP6.9 JP6.10
N$30
  Bottom 0.3: JP6.12 JP6.11
N$38
  Bottom 0.3: JP6.28 JP6.27
N$39
  Bottom 0.3: JP6.30 JP6.29
N$41
  Bottom 0.3: JP6.25 JP6.26
SUPP
  Bottom 4: J5.BATT 47.99,140.42 50.6,137.8 U$5.P$2
VCC  (via drill 0.5)
  Top 0.3: J6.5 36.61,91.99 40.61,87.99 J1.2 48.46,86.99 51.98,83.46 SV7.1 38.17,56.87 38.17,42.56 38.66,42.07 v38.68,42.07 | v41.83,123.94 47.4,123.94 51.29,127.83 SV6.1 | J3.2 58.06,26.99 62.42,22.63 62.42,15.63 67.92,10.13 99.21,10.13 114.65,25.57 129.19,25.57 J4.2 | J9.5 121.43,35.63 122.39,36.59 125.7,36.59 126.32,37.22 126.32,40.08 122.31,44.1 122.31,48.19 126.95,52.83 135.43,52.83 144.17,61.58 SV18.1 144.17,83.43 J2.2 140.61,87.99 J8.5 | SV13.1 134.29,134 129.36,134 IC1.3 122.09,132.98 116.73,132.98 115.57,131.81 v114.07,131.81 | SV17.1 90.34,128.5 v71,128.5
  Bottom 0.3: v38.68,42.07 47.76,42.07 50.84,38.99 50.84,35.53 J7.5 49.43,30.44 50.73,29.15 50.73,27.1 J3.2 | J9.5 121.43,32.65 123.51,30.57 129.42,30.57 130.61,29.38 J4.2 | R2.1 157.11,76.25 152.42,71.55 SV18.1 | SV17.1 104.03,132.59 104.81,131.81 v114.07,131.81 116.22,129.66 116.22,122.72 114.3,120.79 SV8.5 | J6.5 35.02,96.49 32.45,96.49 28.2,100.74 28.2,110.3 v41.83,123.94 | v71,128.5 68.26,131.24 SV6.1
  Bottom 1.2: IC1.3 124.74,138.61 C3.1